# Altium PCB main.PcbDoc
Units mil, origin at the board's own origin, x right, y up, seen from the top; angles counter-clockwise.
Board outline 7940 x 10978 mil, 2 copper layers (Top Layer, Bottom Layer); 80 components, 51 nets, 374 pads, 66 vias.
Unrouted connection lines stored in the file: 14.
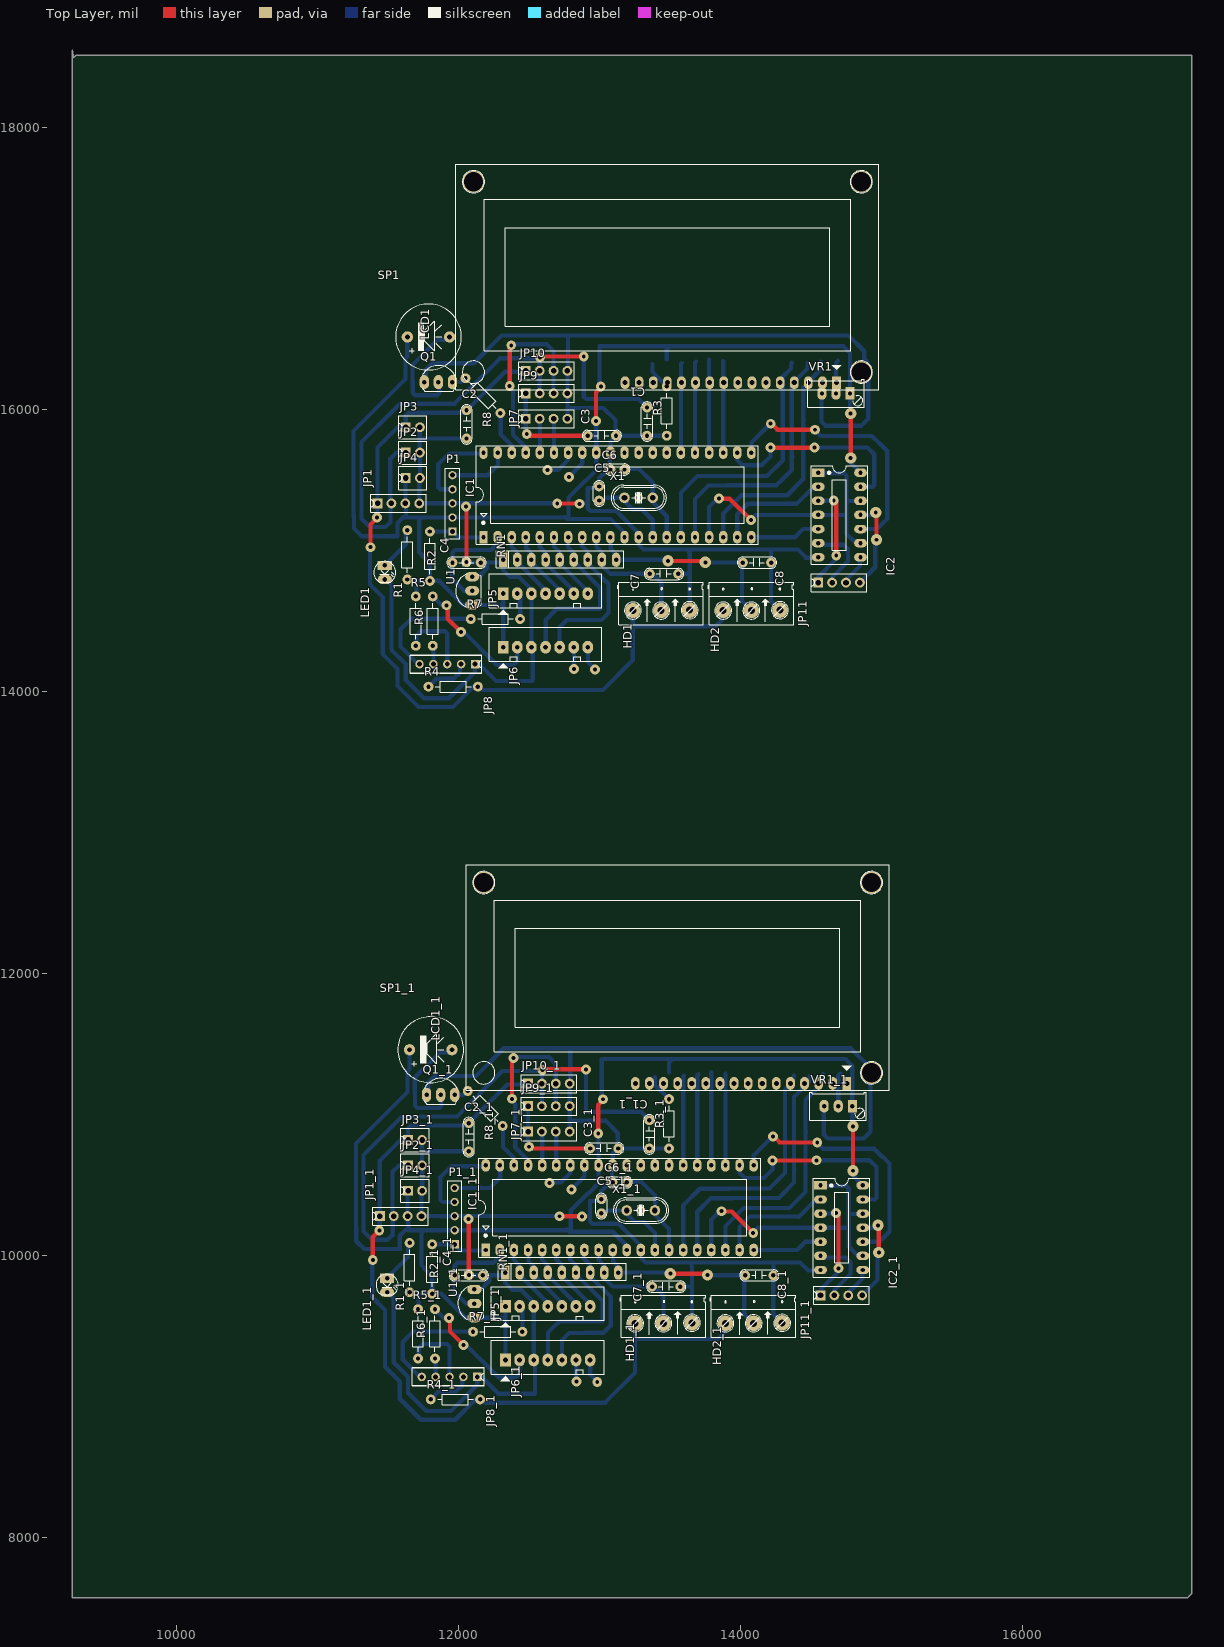
[diagram p0: Top Layer view]
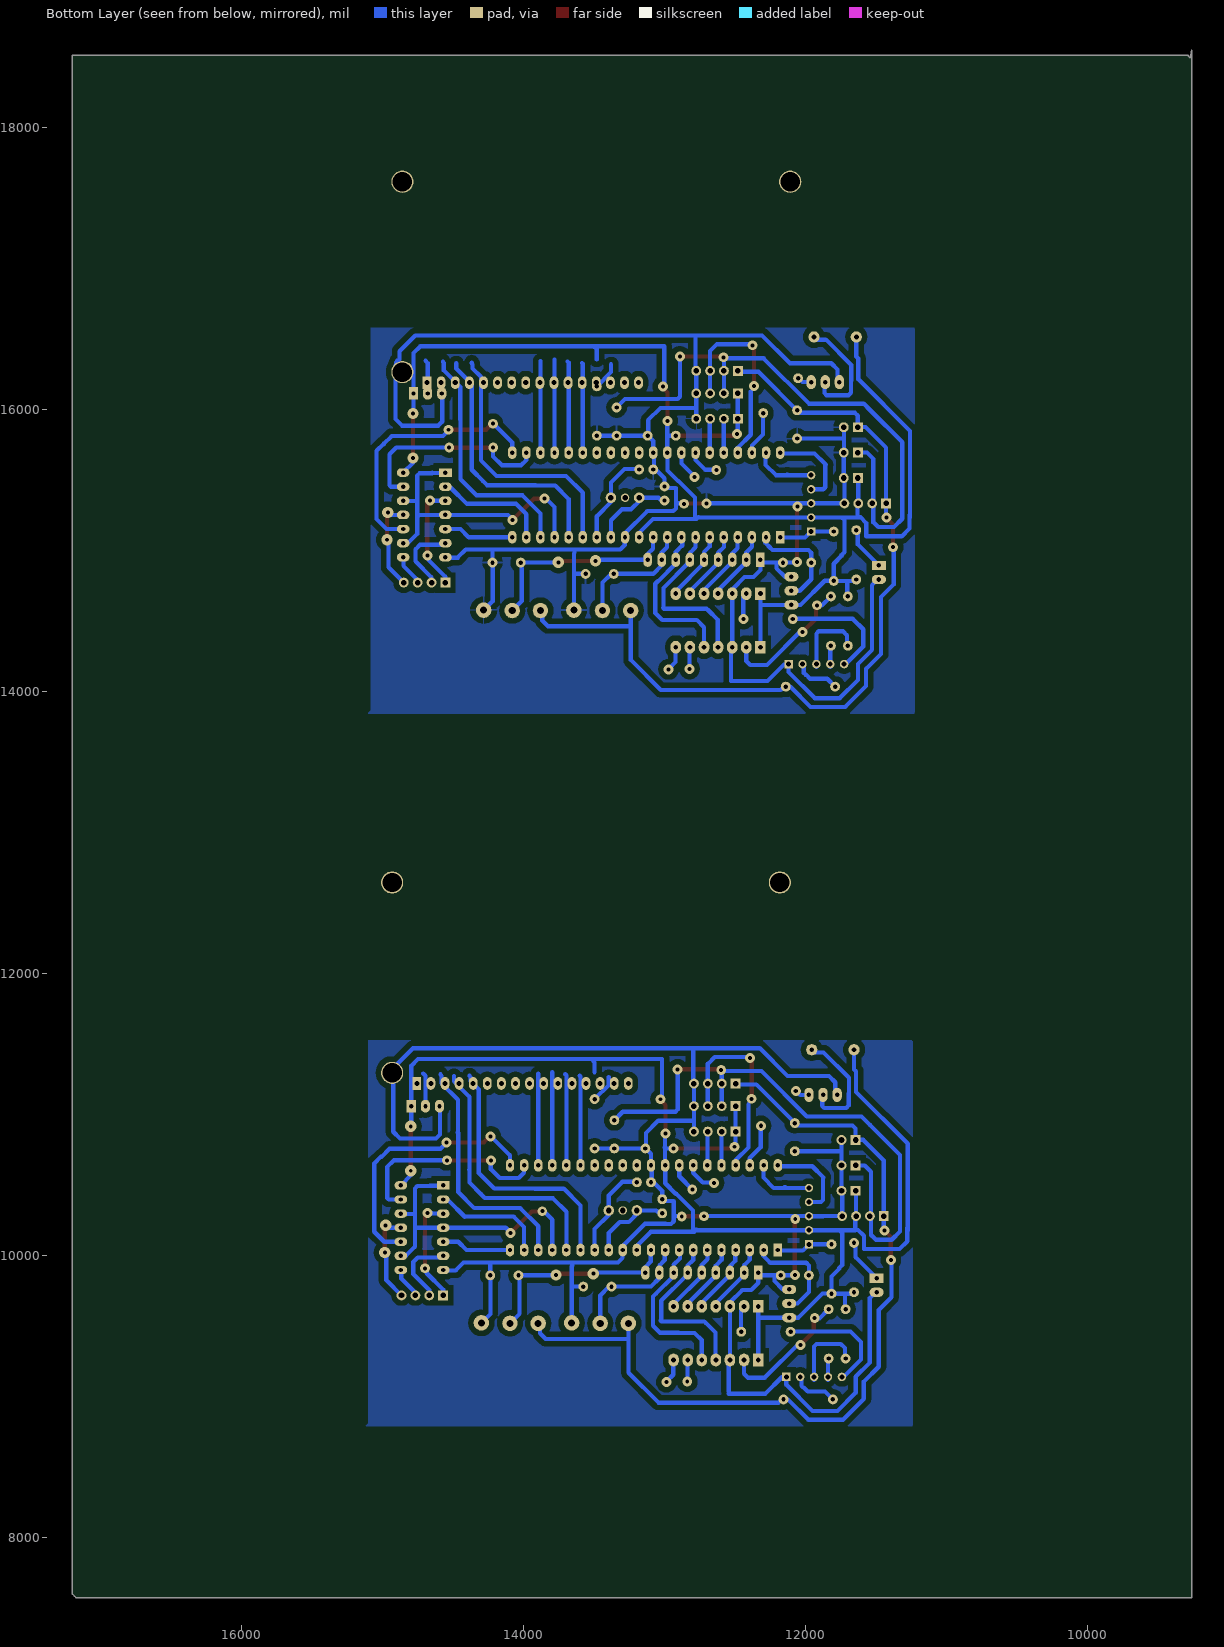
[diagram p1: Bottom Layer view, seen from below]
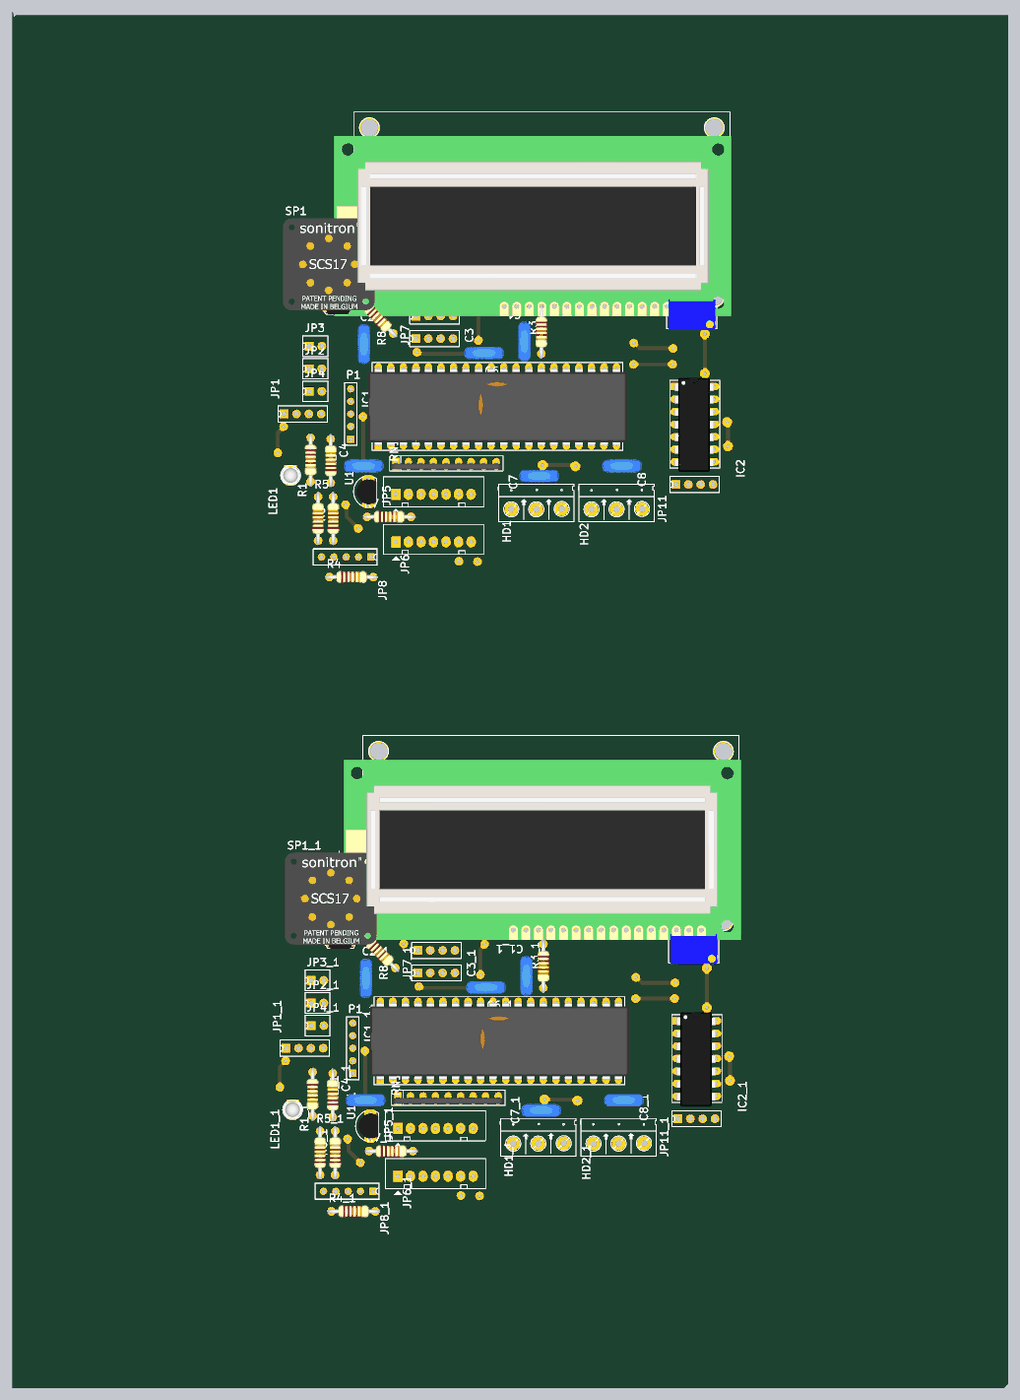
[diagram p2: 3D render of the assembled board from above, using the file's embedded part models]

## Layer stack, top to bottom
Top Layer: signal copper 1.4
Dielectric: dielectric 12.6, FR-4, Dk 4.8
Bottom Layer: signal copper 1.4

## Board outline
9273,18495 9290,18512 17202,18512 17202,7601 17185,7584 17172,7571 9262,7571 9262,18549

## Design rules (kind name [scope] priority, off if disabled: settings)
Clearance [All] p1: gap=40
PolygonConnect [All] p1: connectstyle=Relief reliefconductorwidth=10 reliefentries=4 polygonreliefangle="90 Angle"
RoomDefinition main [InComponentClass('main')] p1: confinementstyle=ConfineIn formatcopy=TRUE lockcomponents=FALSE outline 7045,956 7463,956 7463,1817 7045,1817
RoutingVias [All] p1: holewidth=28 width=50 viastyle="Through Hole" minholewidth=28 minwidth=50 maxholewidth=28 maxwidth=50
SilkscreenOverComponentPads [All] p1: minsilkscreentomaskgap=10
SolderMaskExpansion [All] p1: expansion=4
Width [All] p1: maxlimit=30 minlimit=30 preferedwidth=30
27 further rules are at their usual default settings.

## Classes and differential pairs
component class main: C1 C2 C3 C4 C5 C6 C7 C8 C9 HD1 HD2 IC1 IC2 JP1 JP2 JP3 JP4 JP5 JP6 JP7 JP8 JP9 JP10 JP11 LCD1 LED1 LED2 LED3 LED4 P1 Q1 R1 R2 R3 R4 R5 R6 R7 R8 RN1 SP1 U1 VR1 X1

## Components (designator, comment, footprint, x,y, rotation, side; value= is the part's Value field where it differs from the comment)
C1 "104" CN2 13340,16014 r270 top
C1_1 "104" CN2 13356,10959 r270 top (schematic designator C1)
C2 "104" CN2 12060,15994 r270 top
C2_1 "104" CN2 12076,10939 r270 top (schematic designator C2)
C3 "104" CN2 12920,15814 r0 top
C3_1 "104" CN2 12936,10759 r0 top (schematic designator C3)
C4 "104" CN2 11960,14914 r0 top
C4_1 "104" CN2 11976,9859 r0 top (schematic designator C4)
C5 "33pF" CN1 13000,15354 r90 top
C5_1 "33pF" CN1 13016,10299 r90 top (schematic designator C5)
C6 "33pF" CN1 13180,15574 r180 top
C6_1 "33pF" CN1 13196,10519 r180 top (schematic designator C6)
C7 "104" CN2 13360,14834 r0 top
C7_1 "104" CN2 13376,9779 r0 top (schematic designator C7)
C8 "104" CN2 14020,14914 r0 top
C8_1 "104" CN2 14036,9859 r0 top (schematic designator C8)
HD1 "Header 3" HED3 13240,14574 r0 top
HD1_1 "Header 3" HED3 13256,9519 r0 top (schematic designator HD1)
HD2 "Header 3" HED3 13880,14574 r0 top
HD2_1 "Header 3" HED3 13896,9519 r0 top (schematic designator HD2)
IC1 "18F4520" DIP40/W0.6 12180,15094 r0 top
IC1_1 "18F4520" DIP40/W0.6 12196,10039 r0 top (schematic designator IC1)
IC2 "74HC08" DIP14/W0.3 14554,15552 r270 top
IC2_1 "74HC08" DIP14/W0.3 14570,10497 r270 top (schematic designator IC2)
JP1 "JP4" CON4 11429,15334 r90 top
JP1_1 "JP4" CON4 11445,10279 r90 top (schematic designator JP1)
JP2 "JP2" CON2 11629,15694 r90 top
JP2_1 "JP2" CON2 11645,10639 r90 top (schematic designator JP2)
JP3 "JP2" CON2 11629,15874 r90 top
JP3_1 "JP2" CON2 11645,10819 r90 top (schematic designator JP3)
JP4 "JP2" CON2 11629,15514 r90 top
JP4_1 "JP2" CON2 11645,10459 r90 top (schematic designator JP4)
JP5 "JP7" CON7 12320,14694 r0 top
JP5_1 "JP7" CON7 12336,9639 r0 top (schematic designator JP5)
JP6 "JP7" CON7 12320,14314 r0 top
JP6_1 "JP7" CON7 12336,9259 r0 top (schematic designator JP6)
JP7 "JP4" CON4 12480,15934 r90 top
JP7_1 "JP4" CON4 12496,10879 r90 top (schematic designator JP7)
JP8 "JP5" CON5 12120,14194 r90 top
JP8_1 "JP5" CON5 12136,9139 r90 top (schematic designator JP8)
JP9 "JP4" CON4 12480,16114 r90 top
JP9_1 "JP4" CON4 12496,11059 r90 top (schematic designator JP9)
JP10 "JP4" CON4 12480,16274 r90 top
JP10_1 "JP4" CON4 12496,11219 r90 top (schematic designator JP10)
JP11 "JP4" CON4 14554,14772 r90 top
JP11_1 "JP4" CON4 14570,9717 r90 top (schematic designator JP11)
LCD1 "LCD16x2A" LCD16X2 14684,16190 r180 top
LCD1_1 "LCD16x2A" LCD16X2 14757,11220 r180 top (schematic designator LCD1)
LED1 "LED" LED-3 11480,14894 r270 top
LED1_1 "LED" LED-3 11496,9839 r270 top (schematic designator LED1)
P1 "ICSP-PIC" HDR1X5 11960,15134 r90 top
P1_1 "ICSP-PIC" HDR1X5 11976,10079 r90 top (schematic designator P1)
Q1 "C1815" QTO-92 11860,16194 r0 top
Q1_1 "C1815" QTO-92 11876,11139 r0 top (schematic designator Q1)
R1 "470" R1/4W 11640,14794 r90 top
R1_1 "470" R1/4W 11656,9739 r90 top (schematic designator R1)
R2 "10k" R1/4W 11800,15134 r270 top
R2_1 "10k" R1/4W 11816,10079 r270 top (schematic designator R2)
R3 "470" R1/4W 13480,15814 r90 top
R3_1 "470" R1/4W 13496,10759 r90 top (schematic designator R3)
R4 "1k" R1/4W 12140,14034 r180 top
R4_1 "1k" R1/4W 12156,8979 r180 top (schematic designator R4)
R5 "330" R1/4W 11700,14674 r270 top
R5_1 "330" R1/4W 11716,9619 r270 top (schematic designator R5)
R6 "330" R1/4W 11820,14674 r270 top
R6_1 "330" R1/4W 11836,9619 r270 top (schematic designator R6)
R7 "330" R1/4W 12440,14514 r180 top
R7_1 "330" R1/4W 12456,9459 r180 top (schematic designator R7)
R8 "1k" R1/4W 12300,15974 r135 top
R8_1 "1k" R1/4W 12316,10919 r135 top (schematic designator R8)
RN1 "1K" RN8 12320,14934 r0 top
RN1_1 "1K" RN8 12336,9879 r0 top (schematic designator RN1)
SP1 "Speaker" SPK 11640,16514 r0 top
SP1_1 "Speaker" SPK 11656,11459 r0 top (schematic designator SP1)
U1 "LM35" QTO-92 12100,14714 r90 top
U1_1 "LM35" QTO-92 12116,9659 r90 top (schematic designator U1)
VR1 "10K" VR1 14780,16114 r180 top
VR1_1 "10K" VR1 14796,11059 r180 top (schematic designator VR1)
X1 "12Mhz" XT2 13280,15374 r180 top
X1_1 "12Mhz" XT2 13296,10319 r180 top (schematic designator X1)

## Footprints (in the part's own frame and the unit in brackets; to place one, negate y for a bottom-side part, rotate by r counter-clockwise, add the part's x,y. Pads: shape width x height; smd on the part's side, far side on the other; paste and mask are expansions set on the pad)
CN1 [mil]
  round 70 hole 31: 1(0,0) 2(100,0)
  silkscreen extent -40,-40 141,40, body extent -60,-30 170,37, height 265
CN2 [mil]
  round 70 hole 31: 1(0,0) 2(200,0)
  silkscreen extent -40,-40 240,40, body extent -54,-44 260,55, height 407
CON2 [mil]
  rect 70x70 hole 39.37 unplated: 1(0,0)
  round 70 hole 39.37 unplated: 2(0,-100)
  silkscreen extent -82,-150 82,50
CON4 [mil]
  rect 70x70 hole 39.37 unplated: 1(0,0)
  round 70 hole 39.37 unplated: 2(0,-98.43) 3(0,-196.85) 4(0,-295.28)
  silkscreen extent -64,-344 64,49
CON5 [mil]
  rect 60x60 hole 35: 1(0,0)
  round 60 hole 35: 2(0,98.42) 3(0,196.85) 4(0,295.28) 5(0,393.7)
  silkscreen extent -64,-49 64,460
CON7 [mil] "CON7"
  rect 75x90 hole 34: 1(0,0)
  oval 75x90 hole 34: 2(100,0) 3(200,0) 4(300,0) 5(400,0) 6(500,0) 7(600,0)
  silkscreen extent -100,-150 700,140
DIP14/W0.3 [mil] "14PIN, W 300mil, Pin to pin 100mil"
  rect 60x90 hole 31: 1(0,0)
  oval 60x90 hole 31: 2(100,0) 3(200,0) 4(300,0) 5(400,0) 6(500,0) 7(600,0) 8(600,300) 9(500,300) 10(400,300) 11(300,300) 12(200,300) 13(100,300) 14(0,300)
  silkscreen extent -50,-50 650,350, body extent -70,-12 680,302, height 145
DIP40/W0.6 [mil] "40 PIN, W 600mil, Pin to pin 100mil"
  rect 60x90 hole 31: 1(0,0)
  oval 60x90 hole 31: 2(100,0) 3(200,0) 4(300,0) 5(400,0) 6(500,0) 7(600,0) 8(700,0) 9(800,0) 10(900,0) 11(1000,0) 12(1100,0) 13(1200,0) 14(1300,0) 15(1400,0) 16(1500,0) 17(1600,0) 18(1700,0) 19(1800,0) 20(1900,0) 21(1900,600) 22(1800,600) 23(1700,600) 24(1600,600) 25(1500,600) 26(1400,600) 27(1300,600) 28(1200,600) 29(1100,600) 30(1000,600) 31(900,600) 32(800,600) 33(700,600) 34(600,600) 35(500,600) 36(400,600) 37(300,600) 38(200,600) 39(100,600) 40(0,600)
  silkscreen extent -50,-50 1950,650, body extent -82,-10 1982,600, height 224
HDR1X5 [mm] "Connector; Header; 5 Position"
  rect 1.5x1.5 hole 0.9: 1(0,0)
  round 1.5 hole 0.9: 2(2.54,0) 3(5.08,0) 4(7.62,0) 5(10.16,0)
  silkscreen extent -1.27,-1.27 11.43,1.27, body extent -1.27,-1.27 11.43,1.27, height 7
HED3 [mil] "Header 3, 3 pin, hight 300mil, Pin to Pin 200, Colour Green"
  round 110 hole 50: 1(0,0) 2(200,0) 3(402.62,2.62)
  silkscreen extent -106,-100 500,200
LCD16X2 [mil] "LCD dipslay 16x2, 16 pin"
  rect 62x90 hole 36: 1(0,0)
  oval 62x90 hole 36: 2(100,0) 3(200,0) 4(300,0) 5(400,0) 6(500,0) 7(600,0) 8(700,0) 9(800,0) 10(900,0) 11(1000,0) 12(1100,0) 13(1200,0) 14(1300,0) 15(1400,0) 16(1500,0)
  round 157.48 hole 137.8: "Hole 0"(-175,-75) "Hole 0"(-175,-1425) "Hole 0"(2575,-1425)
  round 157.48 on Drill Drawing: "Hole 0"(2575,-75)
  silkscreen extent -300,-1550 2700,50, body extent -315,-1360 2855,77, height 414
LED-3 [mil] "LED 2 PIN, 3ly Only colour"
  rect 65x100 hole 32: 1(0,0)
  oval 65x100 hole 32: 2(100,0)
  silkscreen extent -29,-78 118,79, body extent -13,-75 125,75, height 217
QTO-92 [mil] "TO-92"
  oval 66x100 hole 32: 1(-100,0) 2(0,0) 3(100,0)
  silkscreen extent -117,-65 120,118, body extent -109,-66 109,95, height 245
R1/4W [mil] "R 1/4W, 2 Pin, 350mil"
  round 70 hole 31: 1(0,0) 2(350,0)
  silkscreen extent 48,-38 302,38, body extent -40,-47 386,47, height 111
RN8 [mil] "R SIP8, 9 Pin"
  rect 60x100 hole 32: 1(0,0)
  oval 60x100 hole 32: 2(100,0) 3(200,0) 4(300,0) 5(400,0) 6(500,0) 7(600,0) 8(700,0) 9(800,0)
  silkscreen extent -50,-55 855,65, body extent -43,-44 843,5, height 259
SPK [mil] "Speaker Chip"
  round 80 hole 35: 1(0,0) 2(300,0)
  silkscreen extent -84,-234 384,234, body extent -221,-354 511,378, height 344
VR1 [mil] "Variable Resistor"
  rect 65x90 hole 30: 1(0,0)
  oval 65x90 hole 30: 2(100,0) 3(200,0)
  silkscreen extent -100,-100 301,100, body extent -88,-130 288,110, height 455
XT2 [mm] "Footpin for Crystal 2 pin"
  round 1.524 hole 1: 0(0,0)
  round 1.905 hole 1: 1(-2.54,0) 2(2.54,0)
  silkscreen extent -5.03,-2.29 4.96,2.29, body extent -5.93,-2.36 5.42,2.29, height 3.5

## Part data
C1 C1_1 C2 C2_1 C3 C3_1 C4 C4_1 C7 C7_1 C8 C8_1: library part CN2, "Cap np 104 => 105pF"
C5 C5_1 C6 C6_1: library part CN1, "Cap np  1pF - 472pF"
HD1 HD1_1 HD2 HD2_1: library part Hed3, "Header 3 (Green)"
IC1 IC1_1: "32KB Flash, 1536B RAM, 256B EFROM, 40-Pin PDIP"
JP1 JP1_1 JP7 JP7_1 JP9 JP9_1 JP10 JP10_1 JP11 JP11_1: library part Con4, "Connector 4"
JP2 JP2_1 JP3 JP3_1 JP4 JP4_1: library part Con2, "Connector 2"
JP5 JP5_1 JP6 JP6_1: library part Con7, "Connector 7"
JP8 JP8_1: library part Con5, "Connector 5"
LCD1 LCD1_1: library part LCD16x2, "LCD dipslay 16 char, 2 line"
LED1 LED1_1: "LED Single colour Green and Red"
P1 P1_1: "Header, 5-Pin"
Q1 Q1_1: "NPN 600mW, ECB"
R1 R1_1 R2 R2_1 R3 R3_1 R4 R4_1 R5 R5_1 R6 R6_1 R7 R7_1 R8 R8_1: library part R1/4W, "Resistor 1/4W"
RN1 RN1_1: library part RN8, "Resistor 8 (Thanh)"
SP1 SP1_1: library part SPK, "Speaker Chip"
U1 U1_1: "Teminal"
VR1 VR1_1: library part VR, "Var Resistor"
X1 X1_1: library part XT2, "Crystal For all Crystal 2pin."

## Via types
v1: diameter 70, hole 28, Top Layer to Bottom Layer, 54 vias
v2: diameter 80, hole 28, Top Layer to Bottom Layer, 12 vias

## Nets (pads, with @x,y where several pads share a name; then routed paths per layer and width w, separated by ;. In a path a pad name is that pad's centre, name@x,y a point inside that pad or via, vN(x,y) a via of type N, cw(c..) or ccw(c..) an arc to the next point about the centre after c; other vN are vias at no path point)
1: IC1.8 JP6.5 RN1.7 | length 1102.4
  Bottom Layer w30: JP6.5@12714,14318 JP6.5@12720,14324 ; JP6.5 JP6.5@12720,14324 ; JP6.5@12722,14297 JP6.5@12722,14314 ; IC1.8@12876,15080 12875,15079 12875,15034 12920,14989 ; 12885,14506 12771,14506 12720,14455 JP6.5@12720,14324 ; 12885,14507 13016,14507 13066,14557 13066,14764 13048,14782 ; RN1.7 12920,14908 13047,14781
2: C7.1 HD1.2 IC1.9 RN1.8 | length 848.1
  Bottom Layer w30: IC1.9@12982,15085 12982,15023 13020,14985 RN1.8 ; RN1.8@13021,14927 13021,14893 13080,14834 13337,14834 C7.1@13348,14823 ; C7.1@13354,14822 C7.1@13357,14825 ; C7.1@13377,14835 13440,14772 13440,14634 HD1.2
3: C8.1 HD2.2 IC1.10 RN1.9 | length 1416.3
  Top Layer w30: v2(13489,14926) 13734,14926 v2@13745,14915
  Bottom Layer w30: IC1.10@13082,15082 13082,15012 13120,14974 RN1.9 ; RN1.9@13136,14950 RN1.9 ; v2@13505,14930 13501,14934 RN1.9 ; v2@13765,14914 C8.1 ; 14013,14874 14013,14641 HD2.2
  other v2: 13753,14916
5V: C1.1 JP1.2 JP2.1 JP9.2 JP10.2 | length 4211.7
  Top Layer w30: v1@12590,16375 v1(12891,16375)
  Bottom Layer w30: JP1.2@11519,15348 11519,15649 11564,15694 JP2.1 ; 11520,15198 11520,15202 ; JP1.2@11525,15324 JP1.2@11525,15331.57 ; 11525,15979 11537,15991 ; JP1.2@11526,15342 JP1.2@11526,15339 ; JP1.2 JP1.2@11526,15332.57 ; JP9.2@12581,16103 12578.43,16105.57 JP9.2 JP10.2 12578.43,16362.57 12297,16362.57 11975.43,16041 11587,16041 11537,15991 ; v1@12891,16345 12891,16090 12907,16074 13280,16074 C1.1 ; v1@12894,16345 v1@12894,16350 ; 11520,15202 11520,15326.57 JP1.2@11525,15331.57 ; 11520,15202 11484,15166 11373,15166 11314,15225 11314,15768 11537,15991 ; JP1.2@11525,15331.57 JP1.2@11526,15332.57 ; JP1.2@11525,15331.57 11525,15338 JP1.2@11526,15339 ; JP1.2@11526,15332.57 JP1.2@11526,15339
  other v1: 12582,16370
12V: C2.1 HD1.1 HD2.1 JP1.1 JP3.1 JP10.1 R4.1 | length 6152
  Top Layer w30: v1(11379,15023) 11379,15185 v1@11425,15231
  Bottom Layer w30: v1@11383,15026 11375,15018 11375,14759 11465,14669 11465,14266 11570.5,14160.5 11570.5,14038.5 11719,13890 11964,13890 12108,14034 R4.1@12139,14034 ; v1@11429,15235 JP1.1 11429,15729 11575,15875 JP3.1@11622,15875 ; JP3.1 JP3.1@11629,15875 ; JP3.1@11630,15883 JP3.1@11629,15882 ; JP3.1@11635,15875 JP3.1@11629,15875 ; R4.1@12140,14023 R4.1 ; R4.1@12146,14043 R4.1@12153,14036 ; R4.1@12152,14035 12176,14011 12266,14011 ; 12209,14011 12266,14011 ; 12427,16267 12333,16267 12042,15976 11650,15976 11629,15955 JP3.1@11629,15882 ; 12427,16268 12472,16268 12475,16271 JP10.1@12479,16271 ; JP10.1@12479,16274 JP10.1 ; HD1.1@13238,14602 13239,14601 13239,14223 13027,14011 12266,14011 ; 13249,14463 13827,14463 13829,14465 ; 13829,14466 13830,14466 13867,14503 HD2.1@13867,14556 ; JP3.1@11622,15875 JP3.1@11629,15875 ; JP3.1@11622,15875 JP3.1@11629,15882 ; JP3.1@11629,15875 JP3.1@11629,15882
  other v1: 11425,15233
COI: IC1.38 R8.1 | length 318.6
  Bottom Layer w30: R8.1@12301,15973 12302,15972 12302,15823 12380,15745 IC1.38 IC1.38@12380,15700.92
D4: IC1.23 LCD1.11 | length 649
  Bottom Layer w30: IC1.23 13880,16343
D5: IC1.24 LCD1.12 | length 660
  Bottom Layer w30: IC1.24 13780,16354
D6: IC1.25 LCD1.13 | length 650.3
  Bottom Layer w30: IC1.25 13680,16333 13688,16341
D7: IC1.26 LCD1.14 | length 638.5
  Bottom Layer w30: IC1.26 13580,16324 13586,16330
E: IC1.15 LCD1.6 | length 1852.4
  Bottom Layer w30: IC1.15 13580,15410 13698,15528 13904,15528 ; 13904,15529 14157,15529 14192,15529 14302,15639 14302,16232 14361,16291 14361,16321 14367,16327 14367,16332
ECHO: IC1.35 JP7.3 | length 231.2
  Bottom Layer w30: JP7.3@12677,15924 12680,15921 IC1.35
GND: C1.2 C2.2 C3.2 C4.2 C5.2 C6.2 C7.2 C8.2 HD1.3 HD2.3 IC1.12 IC1.31 IC2.7 JP1.4 JP2.2 JP3.2 JP4.2 JP5.3 JP6.3 JP7.4 JP8.1 JP9.4 JP10.4 LCD1.1 LED1.2 P1.3 Q1.1 R3.1 RN1.1 U1.3 VR1.3 | length 14948
  Top Layer w30: v1(12060,14917) v1@12060,15306 ; v1(12703,15333) v1@12854,15333
  Bottom Layer w30: LED1.2@11496,14790 11496,14786 11528,14754 11528,14295 11628.5,14194.5 11628.5,14081.5 11758,13952 11934,13952 12120,14138 12120,14192 JP8.1@12124,14196 ; JP2.2@11713,15708 11728,15693 JP3.2@11728,15873 ; JP1.4 11724.28,15494.28 JP4.2@11732,15502 ; JP1.4@11725,15334 P1.3 v1@12061,15334 ; JP4.2 JP2.2@11729,15685 ; 11730,15792 11732,15794 C2.2 ; Q1.1@11773,16221 11773,16283 11818,16328 12111,16328 12308,16525 14768,16525 14880,16413 14880,16354 ; 11860,15333 P1.3@11962,15333 ; v1@12055,14914 12057,14914 12060,14911 12063,14914 C4.2 12200,14914 ; v1@12059,15302 12061,15304 v1@12061,15334 ; U1.3 12146,14814 12205,14873 12205,14902 ; 12153,14191 12269,14075 12528,14075 ; 12201,14915 12301,14915 RN1.1 ; RN1.1@12319,14911 12319,14861 12369,14811 12432,14811 12520,14723 JP5.3 ; JP6.3 12520,14406 ; 12520,14374 12520,14406 ; JP6.3@12525,14310 12529,14306 12529,14089 12528,14088 ; JP6.3@12531,14310 JP6.3@12531,14311 ; JP5.3@12535,14682 12520,14667 12520,14406 ; v1@12713,15341 12706,15334 v1@12061,15334 ; JP7.4 JP9.4 JP10.4 12775.28,16276.28 JP10.4@12779,16280 ; JP10.4@12780,16274 12780,16514 ; 12782,16011 13029,16011 13116,15924 C3.2@13116,15814 ; v1@12862,15335 12919,15335 ; 12975,15279 12938,15279 12919,15298 12919,15335 ; 12976,15280 13122,15280 IC1.12@13280,15122 ; C5.2 C5.2@13000,15455 ; C5.2@13001,15455 C5.2@13000,15455 ; C6.2@13072,15570 13071,15571 13059,15571 13000,15512 C5.2@13000,15455 ; IC1.31@13075,15669 13075,15579 C6.2 ; IC1.31 13080,15776 C3.2@13118,15814 ; C3.2 C1.2 R3.1 13482,15814 R3.1@13483,15813 ; IC1.12@13282,15067 13282,15038 13314,15006 14410,15006 14467,14949 ; C7.2 13628,14834 ; 13639,14983 13639,14997 ; 13642.62,14636.62 13642.62,14978.38 ; 14214,15005 14220,14999 C8.2 C8.2@14220,14913 ; C8.2@14219,14913 14219,14640.24 HD2.3 HD2.3@14286.24,14573 ; HD2.3@14286,14579 HD2.3@14291,14574 ; 14465,14948 IC2.7@14535,14948 ; IC2.7@14535,14952 IC2.7@14537,14952 ; IC2.7@14544,14945 IC2.7@14537,14952 ; IC2.7@14555,14952 IC2.7 IC2.7@14537,14952 ; VR1.3 VR1.3@14580,16102 ; VR1.3@14581,16103 VR1.3@14580,16102 ; 14892,16333 14892,16340 14897,16345 ; 14902,16314 14902,16333 ; 14908,16314 14908,15932 14861,15885 14605,15885 14577,15913 14577,16099 VR1.3@14580,16102 ; 12919,15335 12919,15440 12921,15442 12972,15442 12985,15455 C5.2@13000,15455
  other v1: 12057,15313 12862,15331
"HUT BUI": IC1.37 JP9.3 JP10.3 | length 1415.1
  Top Layer w30: v1(12366,16166) v1@12366,16461
  Bottom Layer w30: v1@12377,16451 12389,16463 12628,16463 12676.85,16414.15 JP10.3 12676.85,16262.15 JP9.3 12676.85,16110.85 JP9.3@12674,16108 ; 12389,16026 12389,16009 ; 12389,16127 12389,16009 ; IC1.37 12480,15700.92 12480,15730 12389,15821 12389,16009
  other v1: 12377,16455
IN1: IC1.19 IC2.2 | length 829.8
  Bottom Layer w30: IC1.19@13980,15100.92 IC1.19 13980,15257 14054,15331 14399,15331 ; 14400.5,15329.5 14516,15445 IC2.2@14546,15445 ; IC2.2@14539,15458 IC2.2@14546,15458 ; IC2.2@14551,15453 IC2.2@14558,15460
IN2: IC1.20 IC2.5 | length 525
  Bottom Layer w30: IC1.20 14389,15094 14447,15152 IC2.5 14556,15152 IC2.5@14581,15152
IN3: IC1.21 IC2.10 | length 1862.1
  Top Layer w30: v1@14231,15892 14264,15859 14264,15856 v1(14531,15856)
  Bottom Layer w30: IC1.21 14080,15715 14080,15765 v1@14214,15899 ; v1@14528,15856 14572,15812 14934,15812 14992,15754 ; IC2.10@14860.92,15152 IC2.10 14972,15152 15043,15223 15043,15707 14994,15756
  other v1: 14217,15899
IN4: IC1.22 IC2.13 | length 1481.1
  Top Layer w30: v1(14215,15729) v1@14525,15729
  Bottom Layer w30: IC1.22 13980,15642 14018,15604 14153,15604 14216,15667 v1@14216,15730 ; v1@14523,15737 14529.5,15730.5 14902.5,15730.5 14951,15682 14951,15463 14940,15452 IC2.13 IC2.13@14860.92,15452
  other v1: 14527,15730
"IN A": IC2.3 JP11.1 | length 722.9
  Top Layer w30: v1(14682,14964) v1@14682,15343
  Bottom Layer w30: JP11.1 14554,14813 14670,14929 v1@14670,14945 ; IC2.3 14628,15352 ; v1@14633,15357 14628,15352 ; v1@14669,15354 14667,15352 14628,15352
  other v1: 14664,15355
"IN B": IC2.6 JP11.2 | length 497.9
  Bottom Layer w30: IC2.6@14569,15051 14580,15040 14671,15040 14734,15040 14766,15008 14766,14923 14652.43,14809.43 JP11.2
"IN C": IC2.8 JP11.3 | length 213.5
  Bottom Layer w30: JP11.3 14750.85,14790.85 14851,14891 IC2.8@14851,14944
"IN D": IC2.11 JP11.4 | length 648.1
  Top Layer w30: v2(14968,15076) v2@14968,15265
  Bottom Layer w30: JP11.4 14958,14880.72 v2@14958,15083 ; IC2.11 v2@14947,15252 ; IC2.11@14874,15260 14877,15260 IC2.11@14882,15255
  other v2: 14962,15269
LM35: C4.1 IC1.2 U1.2 | length 745.7
  Bottom Layer w30: C4.1@11959,14911 11959,14796 12041,14714 U1.2 ; C4.1 11960,14984 11979,15003 12235,15003 12251,15019 ; 12250.5,15019.5 12285,15054 12285,15084 IC1.2@12284,15085
M0: IC1.3 JP5.4 RN1.2 | length 428.9
  Bottom Layer w30: IC1.3@12379,15085 12379,15026 12420,14985 ; RN1.2@12419,14923 12422,14923 RN1.2@12428.5,14916.5 ; RN1.2@12425,14913 12620,14718 JP5.4
M1: IC1.4 JP5.5 RN1.3 | length 470.5
  Bottom Layer w30: IC1.4@12483,15084 12483,15016 12520,14979 RN1.3 ; RN1.3@12525,14914 12720,14719 JP5.5 ; RN1.3@12526,14910 RN1.3@12527,14909 ; RN1.3@12527,14907 RN1.3@12527,14909 ; RN1.3@12527,14910 RN1.3@12527,14909
M2: IC1.5 JP5.6 RN1.4 | length 478.8
  Bottom Layer w30: IC1.5@12579,15084 12579,15025 12620,14984 RN1.4 ; RN1.4@12612,14912 RN1.4@12621,14912 ; RN1.4@12620,14913 RN1.4@12621,14912 ; RN1.4@12622,14912 RN1.4@12621,14912 ; JP5.6 12820,14713 RN1.4@12621,14912
M3: IC1.6 JP5.7 RN1.5 | length 481.1
  Bottom Layer w30: IC1.6 12680,15028 12720,14988 RN1.5 ; RN1.5@12716,14914 12920,14710 JP5.7
NetJP8_2: JP8.2 R4.2 | length 322.2
  Bottom Layer w30: R4.2 11846,14090 11968,14090 11997,14119 12001,14119 12013,14131 JP8.2@12013,14190
NetJP8_3: JP8.3 R5.2 | length 540.1
  Bottom Layer w30: R5.2@11705,14331 11705,14398 11734,14427 11906,14427 11923.15,14409.85 JP8.3@11923.15,14174
NetJP8_4: JP8.4 R6.2 | length 144.7
  Bottom Layer w30: R6.2@11823,14318 11824.72,14316.28 JP8.4@11824.72,14174
NetJP8_5: JP8.5 R7.2 | length 833.3
  Bottom Layer w30: JP8.5 11715,14194 11591,14318 11591,14441 11665,14515 R7.2@12084,14515
NetLCD1_3: LCD1.3 VR1.2 | length 237.2
  Bottom Layer w30: VR1.2 14680,16330 14695,16345
NetLCD1_16: LCD1.16 R3.2 | length 197.8
  Bottom Layer w30: 13379,16320 13379,16265 R3.2
NetLED1_1: LED1.1 R1.2 | length 329.2
  Bottom Layer w30: LED1.1 11629,15043 11629,15131 R1.2@11632,15134 ; R1.2@11633,15135 R1.2@11632,15134 ; R1.2@11651,15148 11637,15134 R1.2@11632,15134
NetQ1_2: Q1.2 SP1.2 | length 833.8
  Bottom Layer w30: 11676,16204 11676,16315 11856,16495 11937,16495 SP1.2@11949,16507 ; 11678,16204 11678,16118 11695,16101 11851,16101 11866,16116 Q1.2@11866,16188 ; Q1.2@11860,16183 Q1.2
NetQ1_3: Q1.3 R8.2 | length 99.2
  Bottom Layer w30: Q1.3 12021,16194 R8.2@12048,16221
OSC1: C5.1 IC1.13 X1.2 | length 621.3
  Bottom Layer w30: C5.1@13009,15356 13016,15363 13031.71,15363 13042.71,15374 X1.2 ; X1.2@13175,15354 13237,15292 13302,15292 13380,15214 IC1.13 13380,15143 ; X1.2@13179,15362 13181,15360 X1.2@13181,15352
OSC2: C6.1 IC1.14 X1.1 | length 663.2
  Bottom Layer w30: C6.1@13185,15577 13284,15577 13380,15481 13380,15380 X1.1 13380,15343 13480,15243 IC1.14
PGC: IC1.39 P1.5 | length 443.1
  Bottom Layer w30: P1.5@11951,15528 P1.5@11952.5,15526.5 ; P1.5 12124,15534 ; P1.5@11960,15540 P1.5@11963,15537 ; 12134,15538 12128,15538 12124,15534 ; IC1.39@12281,15678 12283,15676 12283,15607 12210,15534 12124,15534
PGD: IC1.40 P1.4 | length 632
  Bottom Layer w30: 11856.5,15608.5 11860,15612 ; P1.4 11874,15434 11860,15448 11860,15612 ; IC1.40@12182,15679 12173,15688 12125,15688 11936,15688 11860,15612
PWM: IC1.17 IC2.1 IC2.4 IC2.9 IC2.12 | length 2140.9
  Top Layer w30: v1@13858,15372 13863,15367 13925,15367 v1(14077,15215)
  Bottom Layer w30: IC1.17 13780,15309 13843,15372 v1@13864,15372 ; v1@14089,15231 14110,15252 IC2.4 14741,15252 14750,15243 ; IC2.4@14546,15262 IC2.4@14550,15258 ; IC2.1 IC2.1@14571,15552 ; IC2.1@14571,15549 14644,15549 14647,15552 ; 14647,15547 14738,15547 14754.5,15530.5 14754.5,15339.5 ; 14760,15345 14754.5,15339.5 ; 14760,15350 14844,15350 IC2.12@14853,15359 ; IC2.9 14820,15052 14754.5,15117.5 14754.5,15339.5
  other v1: 13851,15369
RS: IC1.18 LCD1.4 | length 1743.1
  Bottom Layer w30: IC1.18 13880,15263 14008,15391 14074,15391 ; 14093,15391 14074,15391 ; 14448.34,15928 14448.34,16159 14565,16275.66 14565,16329 14572,16336 14572,16340 ; 14451,15928 14447,15924 14447,15505 14334,15392 14075,15392 14074,15391
RST: IC1.1 P1.1 R2.1 | length 372.1
  Bottom Layer w30: R2.1@11820,15134 11954,15134 P1.1@11957,15137 ; P1.1 12003,15091 IC1.1@12176,15091
RW: IC1.16 LCD1.5 | length 1866.4
  Bottom Layer w30: IC1.16 13680,15207 13680,15228 13680,15365 13775,15460 13912,15460 ; 13931,15460 13912,15460 ; 14284.5,15489.5 14367,15572 14367,15661 ; 14285,15489 14259,15463 13915,15463 13912,15460 ; 14369,15663 14367,15661 ; 14477,16327 14477,16290 14367,16180 14367,15661
T0: IC1.7 JP6.4 RN1.6 | length 1182.4
  Bottom Layer w30: JP6.4@12622,14297 12622,14322 12622,14508 12693,14579 ; 12693.5,14578.5 12702,14587 12746,14587 ; 12768,14587 12746,14587 ; IC1.7@12780,15088 12780,15023 RN1.6@12820,14983 ; RN1.6@12823,14910 12832,14910 13008,14734 13008,14591 ; 13010,14593 13008,14591 ; 12746,14587 13004,14587 13006,14589 ; 13006,14589 13008,14591 ; 13006,14589 13008,14589 13008,14591
T2: IC1.33 JP6.6 | length 346.2
  Bottom Layer w30: v1@12781,15518 12880,15617 IC1.33 ; JP6.6@12822,14297 12822,14172 v1@12825,14169
  other v1: 12823,14160 12787,15522
T3: IC1.34 JP6.7 | length 397.8
  Bottom Layer w30: v1@12625,15572 12711,15572 12713.5,15574.5 12780,15641 IC1.34 ; JP6.7@12922,14297 12922,14209 12966,14165 v1@12977,14165
  other v1: 12971,14157 12633,15570
TRIG: IC1.36 JP7.2 | length 263.1
  Bottom Layer w30: JP7.2@12579,15951 12580,15950 JP7.2@12580,15929 ; IC1.36 JP7.2@12580,15929 ; JP7.2@12584,15933 JP7.2@12580,15929
VCC: C3.1 IC1.11 IC1.32 IC2.14 JP1.3 JP4.1 JP5.1 JP6.1 JP7.1 JP9.1 LCD1.2 LCD1.15 P1.2 R1.1 R2.2 R5.1 SP1.1 U1.1 VR1.1 | length 10551.4
  Top Layer w30: v1@12498,15814 C3.1 ; v1(12978,15919) 12978,16121 v1@13014,16157 ; v2(14784,15656) v2@14784,15950
  Bottom Layer w30: 11259,15233 11259,15848 11626,16215 11626,16360.71 11640,16374.71 SP1.1 ; 11262,15251 11262,15156 11318,15100 11570,15100 11570,15195 11611,15236 11624,15236 ; R1.1@11620,14794 R1.1 11644,14794 11654,14784 11704,14784 ; JP1.3@11625.85,15333.43 JP1.3 ; JP1.3@11626,15333 11626,15511 JP4.1 ; JP1.3@11631,15320 11631,15235 11632,15234 11743,15234 ; R5.1@11704,14674 11704,14784 ; 11743,14963 11800,14906 R2.2 11704,14784 ; 11746,14966 11724,14988 11724,15215 11743,15234 ; 11763,15234 11783,15234 ; R2.2@11808,14796 R2.2@11810,14794 ; R2.2@11830,14785 11864,14785 12035,14614 U1.1 12317,14614 12319,14612 ; 12320,14374 12320,14400 ; JP6.1@12324,14314 12320,14318 12320,14400 ; JP5.1@12329,14703 JP5.1 12320,14400 ; JP7.1 12480,15841 v1@12502,15819 ; JP9.1 12480,15945 JP7.1@12483,15942 ; 12757,15237 12760,15237 12763,15234 ; 12783,15234 12783,15374.71 12900.29,15492 ; 12904,15492 12979,15567 IC1.32@12979,15694 ; C3.1 12975,15814 12980,15819 ; v1@12977,15917 12980,15914 12980,15819 ; IC1.32@12980,15706 12980,15819 ; 12982,15821 12980,15819 ; v1@13011,16149 v1@13011,16167 ; v1@13012,16166 v1@13011,16167 ; IC1.11 13180,15124 13081,15223 12774,15223 12763,15234 ; 13480,16354 13480,16425 ; 13485,16430 13480,16425 ; 13608,16448 13503,16448 ; 13612.5,16449 13614,16447.5 14732.5,16447.5 14780,16400 14780,16354 VR1.1@14780,16144 ; VR1.1 14780,15982 v2@14785,15977 ; v2@14781,15650 14781,15625 IC2.14 IC2.14@14844,15552 ; IC2.14@14863,15561 IC2.14@14870,15554 ; 11743,15234 11783,15234 ; 11783,15234 P1.2 12763,15234 ; v1@13011,16167 13002,16176 13002,16448 13503,16448 ; 13480,16425 13503,16448
  other v1: 12487,15826 13012,16163
  other v2: 14784,15971
VT1: JP6.2 R6.1 | length 968.2
  Top Layer w30: v1@11926,14617 11926,14516 v1(12021,14421)
  Bottom Layer w30: R6.1 11885,14609 v1@11921,14609 ; v1@12027,14435 12274,14188 12392,14188 12420,14216 JP6.2
  other v1: 11919,14611
VT2: JP5.2 R7.1 | length 192.7
  Bottom Layer w30: JP5.2 12441,14673 R7.1@12441,14510
pads on no net: "LCD1.Hole 0" "LCD1_1.Hole 0" C1_1.1 C1_1.2 C2_1.1 C2_1.2 C3_1.1 C3_1.2 C4_1.1 C4_1.2 C5_1.1 C5_1.2 C6_1.1 C6_1.2 C7_1.1 C7_1.2 C8_1.1 C8_1.2 HD1_1.1 HD1_1.2 HD1_1.3 HD2_1.1 HD2_1.2 HD2_1.3 IC1.27 IC1.28 IC1.29 IC1.30 IC1_1.1 IC1_1.2 IC1_1.3 IC1_1.4 IC1_1.5 IC1_1.6 IC1_1.7 IC1_1.8 IC1_1.9 IC1_1.10 IC1_1.11 IC1_1.12 IC1_1.13 IC1_1.14 IC1_1.15 IC1_1.16 IC1_1.17 IC1_1.18 IC1_1.19 IC1_1.20 IC1_1.21 IC1_1.22 IC1_1.23 IC1_1.24 IC1_1.25 IC1_1.26 IC1_1.27 IC1_1.28 IC1_1.29 IC1_1.30 IC1_1.31 IC1_1.32 IC1_1.33 IC1_1.34 IC1_1.35 IC1_1.36 IC1_1.37 IC1_1.38 IC1_1.39 IC1_1.40 IC2_1.1 IC2_1.2 IC2_1.3 IC2_1.4 IC2_1.5 IC2_1.6 IC2_1.7 IC2_1.8 IC2_1.9 IC2_1.10 IC2_1.11 IC2_1.12 IC2_1.13 IC2_1.14 JP1_1.1 JP1_1.2 JP1_1.3 JP1_1.4 JP2_1.1 JP2_1.2 JP3_1.1 JP3_1.2 JP4_1.1 JP4_1.2 JP5_1.1 JP5_1.2 JP5_1.3 JP5_1.4 JP5_1.5 JP5_1.6 JP5_1.7 JP6_1.1 JP6_1.2 JP6_1.3 JP6_1.4 JP6_1.5 JP6_1.6 JP6_1.7 JP7_1.1 JP7_1.2 JP7_1.3 JP7_1.4 JP8_1.1 JP8_1.2 JP8_1.3 JP8_1.4 JP8_1.5 JP9_1.1 JP9_1.2 JP9_1.3 JP9_1.4 JP10_1.1 JP10_1.2 JP10_1.3 JP10_1.4 JP11_1.1 JP11_1.2 JP11_1.3 JP11_1.4 LCD1.7 LCD1.8 LCD1.9 LCD1.10 LCD1_1.1 LCD1_1.2 LCD1_1.3 LCD1_1.4 LCD1_1.5 LCD1_1.6 LCD1_1.7 LCD1_1.8 LCD1_1.9 LCD1_1.10 LCD1_1.11 LCD1_1.12 LCD1_1.13 LCD1_1.14 LCD1_1.15 LCD1_1.16 LED1_1.1 LED1_1.2 P1_1.1 P1_1.2 P1_1.3 P1_1.4 P1_1.5 Q1_1.1 Q1_1.2 Q1_1.3 R1_1.1 R1_1.2 R2_1.1 R2_1.2 R3_1.1 R3_1.2 R4_1.1 R4_1.2 R5_1.1 R5_1.2 R6_1.1 R6_1.2 R7_1.1 R7_1.2 R8_1.1 R8_1.2 RN1_1.1 RN1_1.2 RN1_1.3 RN1_1.4 RN1_1.5 RN1_1.6 RN1_1.7 RN1_1.8 RN1_1.9 SP1_1.1 SP1_1.2 U1_1.1 U1_1.2 U1_1.3 VR1_1.1 VR1_1.2 VR1_1.3 X1.0 X1_1.0 X1_1.1 X1_1.2
copper on no net: | length 70400.5
  Top Layer w30: v1(11395,9968) 11395,10130 v1@11441,10176 ; v1@11942,9562 11942,9461 v1(12037,9366) ; v1(12076,9862) v1@12076,10251 ; v1(12382,11111) v1@12382,11406 ; v1@12514,10759 12936,10759 ; v1@12606,11320 v1(12907,11320) ; v1(12719,10278) v1@12870,10278 ; v1(12994,10864) 12994,11066 v1@13030,11102 ; v2(13505,9871) 13750,9871 v2@13761,9860 ; v1@13874,10317 13879,10312 13941,10312 v1(14093,10160) ; v1(14231,10674) v1@14541,10674 ; v1@14247,10837 14280,10804 14280,10801 v1(14547,10801) ; v1(14698,9909) v1@14698,10288 ; v2(14800,10601) v2@14800,10895 ; v2(14984,10021) v2@14984,10210
  Bottom Layer w30: 11275,10178 11275,10793 11642,11160 11642,11305.71 11656,11319.71 11656,11459 ; 11278,10196 11278,10101 11334,10045 11586,10045 11586,10140 11627,10181 11640,10181 ; v1@11399,9971 11391,9963 11391,9704 11481,9614 11481,9211 11586.5,9105.5 11586.5,8983.5 11735,8835 11980,8835 12124,8979 12155,8979 ; v1@11445,10180 11445,10279 11445,10674 11591,10820 11638,10820 ; 11496,9839 11645,9988 11645,10076 11648,10079 ; 11512,9735 11512,9731 11544,9699 11544,9240 11644.5,9139.5 11644.5,9026.5 11774,8897 11950,8897 12136,9083 12136,9137 12140,9141 ; 11535,10293 11535,10594 11580,10639 11645,10639 ; 11536,10143 11536,10147 ; 11541,10269 11541,10276.57 ; 11541,10924 11553,10936 ; 11542,10287 11542,10284 ; 11543.43,10279 11542,10277.57 ; 11636,9739 11656,9739 11660,9739 11670,9729 11720,9729 ; 11641.85,10278.43 11641.85,10279 ; 11642,10278 11642,10456 11645,10459 ; 11645,10819 11645,10820 ; 11646,10828 11645,10827 ; 11647,10265 11647,10180 11648,10179 11759,10179 ; 11649,10080 11648,10079 ; 11651,10820 11645,10820 ; 11667,10093 11653,10079 11648,10079 ; 11692,11149 11692,11260 11872,11440 11953,11440 11965,11452 ; 11694,11149 11694,11063 11711,11046 11867,11046 11882,11061 11882,11133 ; 11720,9619 11720,9729 ; 11721,9276 11721,9343 11750,9372 11922,9372 11939.15,9354.85 11939.15,9119 ; 11729,10653 11744,10638 11744,10818 ; 11740.28,10279 11740.28,10439.28 11748,10447 ; 11741,10279 11976,10279 v1@12077,10279 ; 11742.3,9139 11731,9139 11607,9263 11607,9386 11681,9460 12100,9460 ; 11745,10459 11745,10630 ; 11746,10737 11748,10739 12076,10739 ; 11759,9908 11816,9851 11816,9729 11720,9729 ; 11762,9911 11740,9933 11740,10160 11759,10179 ; 11779,10179 11799,10179 ; 11789,11166 11789,11228 11834,11273 12127,11273 12324,11470 14784,11470 14896,11358 14896,11299 ; 11806,8979 11862,9035 11984,9035 12013,9064 12017,9064 12029,9076 12029,9135 ; 11824,9741 11826,9739 ; 11836,9619 11901,9554 v1@11937,9554 ; 11836,10079 11970,10079 11973,10082 ; 11839,9263 11840.72,9261.28 11840.72,9119 ; 11846,9730 11880,9730 12051,9559 12116,9559 12333,9559 12335,9557 ; 11872.5,10553.5 11876,10557 ; 11876,10278 11978,10278 ; 11876,11128 11876,11139 ; 11967,10473 11968.5,10471.5 ; 11975,9856 11975,9741 12057,9659 12116,9659 ; 11976,9859 11976,9929 11995,9948 12251,9948 12267,9964 ; 11976,10079 12019,10036 12192,10036 ; 11976,10379 11890,10379 11876,10393 11876,10557 ; 11976,10479 12140,10479 ; 11976,10485 11979,10482 ; 11976,11139 12037,11139 12064,11166 ; v1@12043,9380 12290,9133 12408,9133 12436,9161 12436,9259 ; v1@12071,9859 12073,9859 12076,9856 12079,9859 12176,9859 12216,9859 ; v1@12075,10247 12077,10249 v1@12077,10279 ; 12116,9759 12162,9759 12221,9818 12221,9847 ; 12150,10483 12144,10483 12140,10479 ; 12156,8968 12156,8979 ; 12162,8988 12169,8981 ; 12168,8980 12192,8956 12282,8956 ; 12169,9136 12285,9020 12544,9020 ; 12198,10624 12189,10633 12141,10633 11952,10633 11876,10557 ; 12217,9860 12317,9860 12336,9879 ; 12225,8956 12282,8956 ; 12266.5,9964.5 12301,9999 12301,10029 12300,10030 ; 12297,10623 12299,10621 12299,10552 12226,10479 12140,10479 ; 12317,10918 12318,10917 12318,10768 12396,10690 12396,10639 12396,10645.92 ; 12335,9856 12335,9806 12385,9756 12448,9756 12536,9668 12536,9639 ; 12336,9319 12336,9345 ; 12340,9259 12336,9263 12336,9345 ; 12345,9648 12336,9639 12336,9345 ; v1@12393,11396 12405,11408 12644,11408 12692.85,11359.15 12692.85,11219 12692.85,11207.15 12692.85,11059 12692.85,11055.85 12690,11053 ; 12395,10030 12395,9971 12436,9930 ; 12405,10971 12405,10954 ; 12405,11072 12405,10954 ; 12435,9868 12438,9868 12444.5,9861.5 ; 12436,9639 12457,9618 12457,9455 ; 12441,9858 12636,9663 12636,9639 ; 12443,11212 12349,11212 12058,10921 11666,10921 11645,10900 11645,10827 ; 12443,11213 12488,11213 12491,11216 12495,11216 ; 12495,11219 12496,11219 ; 12496,10639 12496,10645.92 12496,10675 12405,10766 12405,10954 ; 12496,10879 12496,10786 v1@12518,10764 ; 12496,11059 12496,10890 12499,10887 ; 12499,10029 12499,9961 12536,9924 12536,9879 ; 12536,9259 12536,9351 ; 12536,9319 12536,9351 ; 12541,9255 12545,9251 12545,9034 12544,9033 ; 12541,9859 12736,9664 12736,9639 ; 12542,9855 12543,9854 ; 12543,9852 12543,9854 ; 12543,9855 12543,9854 ; 12547,9255 12547,9256 ; 12551,9627 12536,9612 12536,9351 ; 12595,10029 12595,9970 12636,9929 12636,9879 ; 12595,10896 12596,10895 12596,10874 ; 12596,10639 12596,10874 ; 12597,11048 12594.43,11050.57 12594.43,11059 12594.43,11219 12594.43,11307.57 12313,11307.57 11991.43,10986 11603,10986 11553,10936 ; 12600,10878 12596,10874 ; 12628,9857 12637,9857 ; 12636,9858 12637,9857 ; 12638,9242 12638,9267 12638,9453 12709,9524 ; 12638,9857 12637,9857 ; v1@12641,10517 12727,10517 12729.5,10519.5 12796,10586 12796,10639 ; 12693,10869 12696,10866 12696,10639 ; 12696,10039 12696,9973 12736,9933 12736,9879 ; 12709.5,9523.5 12718,9532 12762,9532 ; v1@12729,10286 12722,10279 v1@12077,10279 ; 12730,9263 12736,9269 ; 12732,9859 12936,9655 12936,9639 ; 12736,9259 12736,9269 ; 12738,9242 12738,9259 ; 12773,10182 12776,10182 12779,10179 ; 12784,9532 12762,9532 ; 12791.28,10879 12791.28,11059 12791.28,11219 12791.28,11221.28 12795,11225 ; 12796,10033 12796,9968 12836,9928 ; 12796,11219 12796,11459 ; v1@12797,10463 12896,10562 12896,10639 ; 12798,10956 13045,10956 13132,10869 13132,10759 ; 12799,10179 12799,10319.71 12916.29,10437 ; 12836,9639 12836,9658 12637,9857 ; 12838,9242 12838,9117 v1@12841,9114 ; 12839,9855 12848,9855 13024,9679 13024,9536 ; v1@12878,10280 12935,10280 ; 12892,10025 12891,10024 12891,9979 12936,9934 ; 12901,9451 12787,9451 12736,9400 12736,9269 ; 12901,9452 13032,9452 13082,9502 13082,9709 13064,9727 ; v1@12907,11290 12907,11035 12923,11019 13296,11019 13356,10959 ; v1@12910,11290 v1@12910,11295 ; 12920,10437 12995,10512 12995,10639 ; 12936,9879 12936,9853 13063,9726 ; 12936,10759 12991,10759 12996,10764 ; 12938,9242 12938,9154 12982,9110 v1@12993,9110 ; 12991,10224 12954,10224 12935,10243 12935,10280 ; 12992,10225 13138,10225 13296,10067 ; v1@12993,10862 12996,10859 12996,10764 ; 12996,10651 12996,10764 ; 12998,10030 12998,9968 13036,9930 13036,9879 ; 12998,10766 12996,10764 ; 13016,10399 13016,10400 ; 13017,10400 13016,10400 ; 13025,10301 13032,10308 13047.71,10308 13058.71,10319 13196,10319 ; 13026,9538 13024,9536 ; v1@13027,11094 v1@13027,11112 ; v1@13028,11111 v1@13027,11112 ; 13037,9872 13037,9838 13096,9779 13353,9779 13364,9768 ; 13088,10515 13087,10516 13075,10516 13016,10457 13016,10400 ; 13091,10614 13091,10524 13096,10519 ; 13096,10639 13096,10721 13134,10759 ; 13098,10027 13098,9957 13136,9919 13136,9879 ; 13136,10759 13356,10759 13496,10759 13498,10759 13499,10758 ; 13152,9895 13136,9879 ; 13191,10299 13253,10237 13318,10237 13396,10159 13396,10039 13396,10088 ; 13195,10307 13197,10305 13197,10297 ; 13196,10039 13196,10069 13097,10168 12790,10168 12779,10179 ; 13201,10522 13300,10522 13396,10426 13396,10325 13396,10319 13396,10288 13496,10188 13496,10039 ; 13254,9547 13255,9546 13255,9168 13043,8956 12282,8956 ; 13265,9408 13843,9408 13845,9410 ; 13298,10012 13298,9983 13330,9951 14426,9951 14483,9894 ; 13370,9767 13373,9770 ; 13393,9780 13456,9717 13456,9579 13456,9519 ; 13395,11265 13395,11210 13496,11109 ; 13496,11299 13496,11370 ; 13501,11375 13496,11370 ; v2@13521,9875 13517,9879 13136,9879 ; 13576,9779 13644,9779 ; 13596,10039 13596,10355 13714,10473 13920,10473 ; 13596,10639 13596,11269 13602,11275 ; 13624,11393 13519,11393 ; 13628.5,11394 13630,11392.5 14748.5,11392.5 14796,11345 14796,11299 14796,11089 ; 13655,9928 13655,9942 ; 13658.62,9581.62 13658.62,9923.38 ; 13696,10039 13696,10152 13696,10173 13696,10310 13791,10405 13928,10405 ; 13696,10639 13696,11278 13704,11286 ; v2@13781,9859 14036,9859 ; 13796,10039 13796,10254 13859,10317 v1@13880,10317 ; 13796,10639 13796,11299 ; 13845,9411 13846,9411 13883,9448 13883,9501 ; 13896,10039 13896,10208 14024,10336 14090,10336 ; 13896,10639 13896,11288 ; 13920,10474 14173,10474 14208,10474 14318,10584 14318,11177 14377,11236 14377,11266 14383,11272 14383,11277 ; 13947,10405 13928,10405 ; 13996,10045.92 13996,10039 13996,10202 14070,10276 14415,10276 ; 13996,10639 13996,10587 14034,10549 14169,10549 14232,10612 v1@14232,10675 ; 14029,9819 14029,9586 14096,9519 ; 14096,10039 14405,10039 14463,10097 14570,10097 14572,10097 14597,10097 ; 14096,10639 14096,10660 14096,10710 v1@14230,10844 ; v1@14105,10176 14126,10197 14570,10197 14757,10197 14766,10188 ; 14109,10336 14090,10336 ; 14230,9950 14236,9944 14236,9859 14236,9858 ; 14235,9858 14235,9585.24 14298.62,9521.62 14302.24,9518 ; 14300.5,10434.5 14383,10517 14383,10606 ; 14301,10434 14275,10408 13931,10408 13928,10405 ; 14302,9524 14307,9519 ; 14385,10608 14383,10606 ; 14416.5,10274.5 14532,10390 14562,10390 ; 14464.34,10873 14464.34,11104 14581,11220.66 14581,11274 14588,11281 14588,11285 ; 14467,10873 14463,10869 14463,10450 14350,10337 14091,10337 14090,10336 ; 14481,9893 14551,9893 ; 14493,11272 14493,11235 14383,11125 14383,10606 ; v1@14539,10682 14545.5,10675.5 14918.5,10675.5 14967,10627 14967,10408 14956,10397 14870,10397 14876.92,10397 ; v1@14544,10801 14588,10757 14950,10757 15008,10699 ; 14551,9897 14553,9897 ; 14555,10403 14562,10403 ; 14560,9890 14553,9897 ; 14562,10207 14566,10203 ; 14567,10398 14574,10405 ; 14570,9717 14570,9758 14686,9874 v1@14686,9890 ; 14570,10297 14644,10297 ; 14570,10497 14587,10497 ; 14571,9897 14570,9897 14553,9897 ; 14585,9996 14596,9985 14687,9985 14750,9985 14782,9953 14782,9868 14668.43,9754.43 14668.43,9717 ; 14587,10494 14660,10494 14663,10497 ; 14596,11059 14596,11047 ; 14597,11048 14596,11047 ; v1@14649,10302 14644,10297 ; 14663,10492 14754,10492 14770.5,10475.5 14770.5,10284.5 ; v1@14685,10299 14683,10297 14644,10297 ; 14696,11059 14696,11275 14711,11290 ; 14766.85,9717 14766.85,9735.85 14867,9836 14867,9889 ; 14776,10290 14770.5,10284.5 ; 14776,10295 14860,10295 14869,10304 ; 14796,11059 14796,10927 v2@14801,10922 ; v2@14797,10595 14797,10570 14870,10497 14860,10497 ; 14865.28,9717 14974,9825.72 v2@14974,10028 ; 14870,9997 14836,9997 14770.5,10062.5 14770.5,10284.5 ; 14870,10197 v2@14963,10197 ; 14876.92,10097 14870,10097 14988,10097 15059,10168 15059,10652 15010,10701 ; 14879,10506 14886,10499 ; 14890,10205 14893,10205 14898,10200 ; 14908,11278 14908,11285 14913,11290 ; 14918,11259 14918,11278 ; 14924,11259 14924,10877 14877,10830 14621,10830 14593,10858 14593,11044 14596,11047 ; 11536,10147 11500,10111 11389,10111 11330,10170 11330,10713 11553,10936 ; 11536,10147 11536,10271.57 11541,10276.57 ; 11541,10276.57 11541,10283 11542,10284 ; 11541,10276.57 11542,10277.57 ; 11542,10277.57 11542,10284 ; 11638,10820 11645,10827 ; 11638,10820 11645,10820 ; 11645,10820 11645,10827 ; 11759,10179 11799,10179 ; 11799,10179 11976,10179 12779,10179 ; 12762,9532 13020,9532 13022,9534 ; 12935,10280 12935,10385 12937,10387 12988,10387 13001,10400 13016,10400 ; 13022,9534 13024,9534 13024,9536 ; 13022,9534 13024,9536 ; v1@13027,11112 13018,11121 13018,11393 13519,11393 ; 13496,11370 13519,11393
  other v1: 12987,9102 12839,9105 11935,9556 11441,10178 12073,10258 12878,10276 14680,10300 13867,10314 12803,10467 12649,10515 14543,10675 12503,10771 14233,10844 13028,11108 12598,11315 12393,11400
  other v2: 13769,9861 14978,10214 14800,10916

## Polygon pours and split planes (outlines as drawn)
no net on Bottom Layer "Bottom Layer-No Net" (solid): 11240,8801 11240,11519 11245,11524 11246,11525 15101,11525 15101,8810 15123,8788 11244,8788
GND on Bottom Layer "Bottom Layer-No Net" (solid): 11224,13856 11224,16574 11229,16579 11230,16580 15085,16580 15085,13865 15107,13843 11228,13843